# EAGLE board cos - POC (EAGLE 9.4.0)
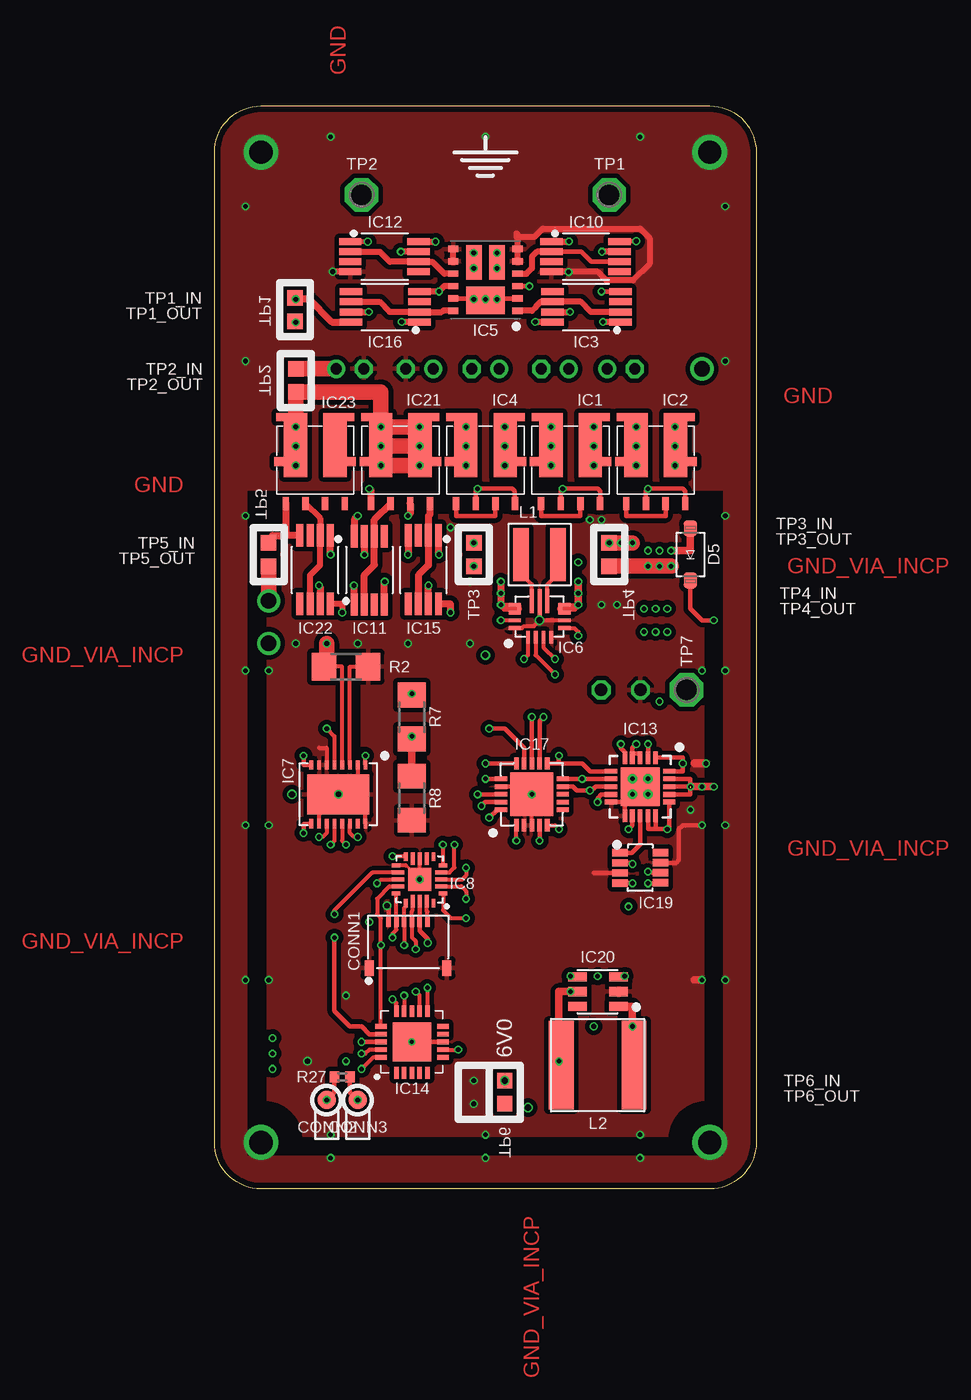
[diagram p0: board, top side]
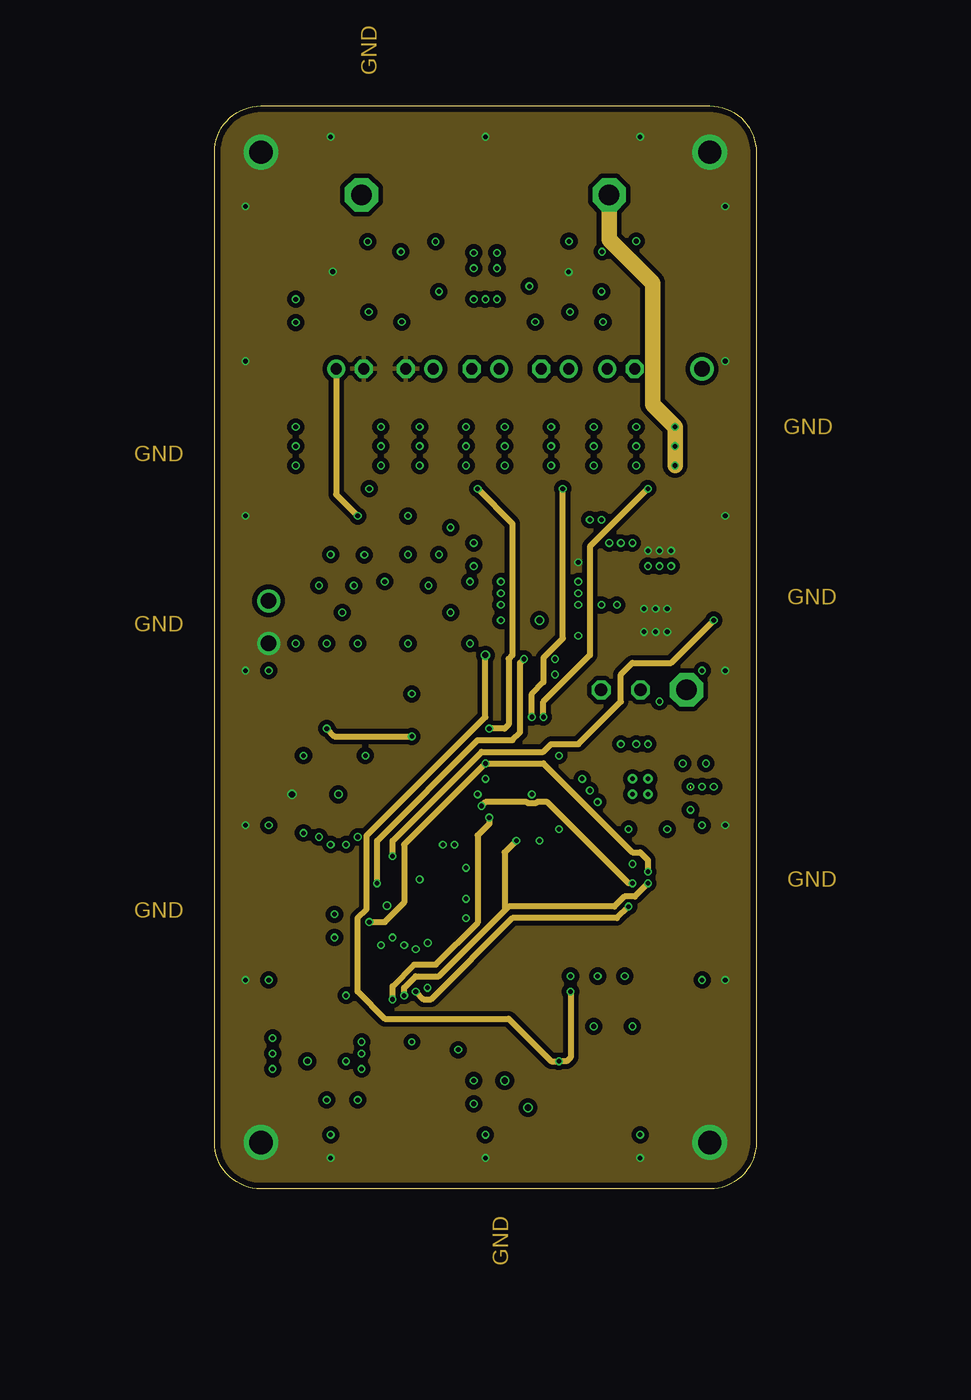
[diagram p1: board, inner layer Route2]
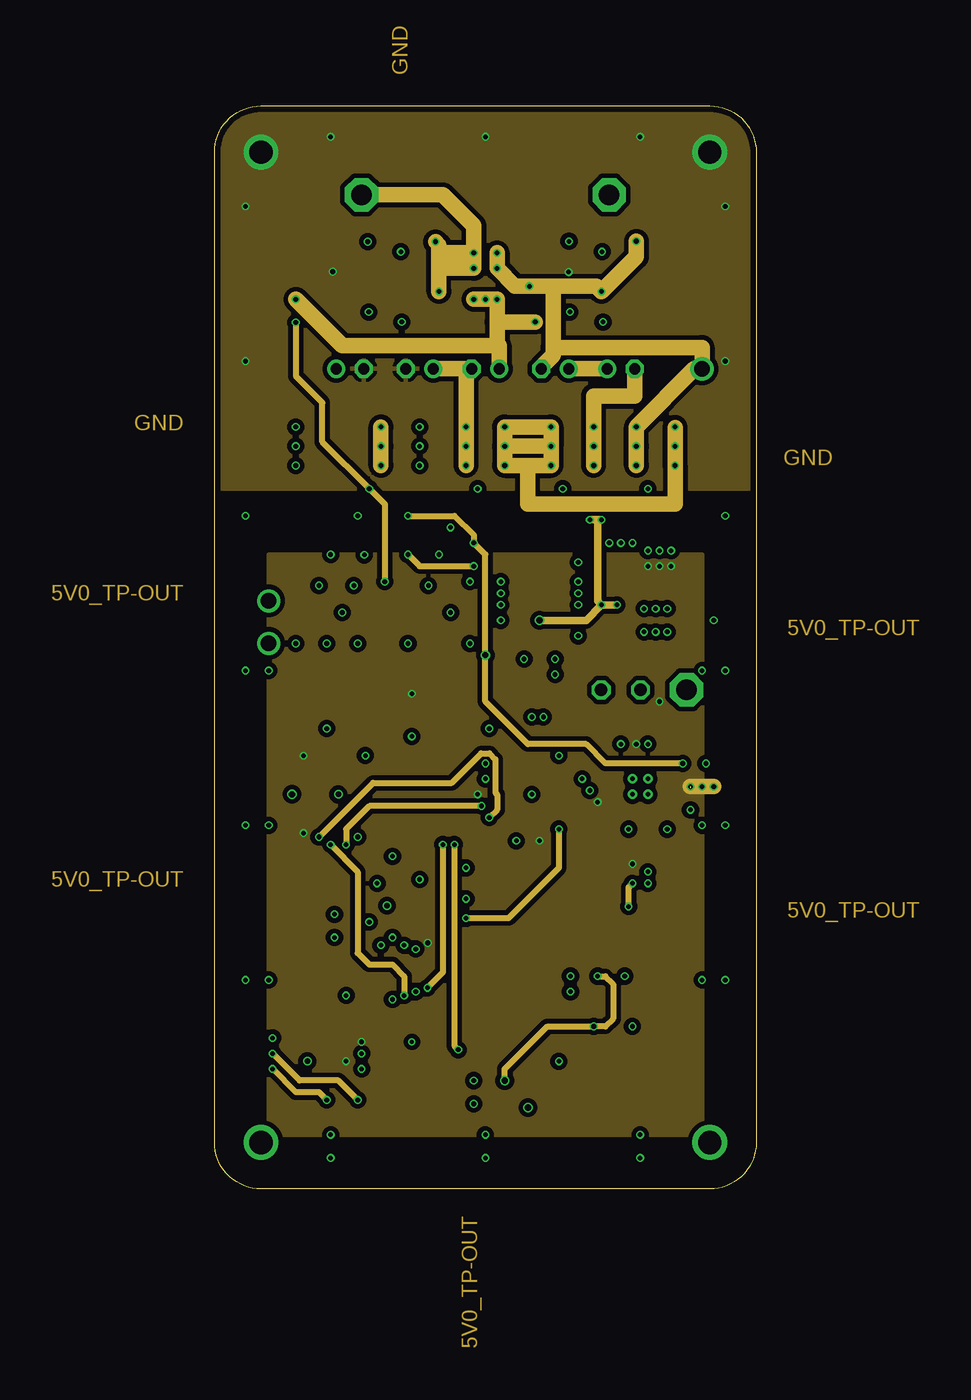
[diagram p2: board, inner layer Route15]
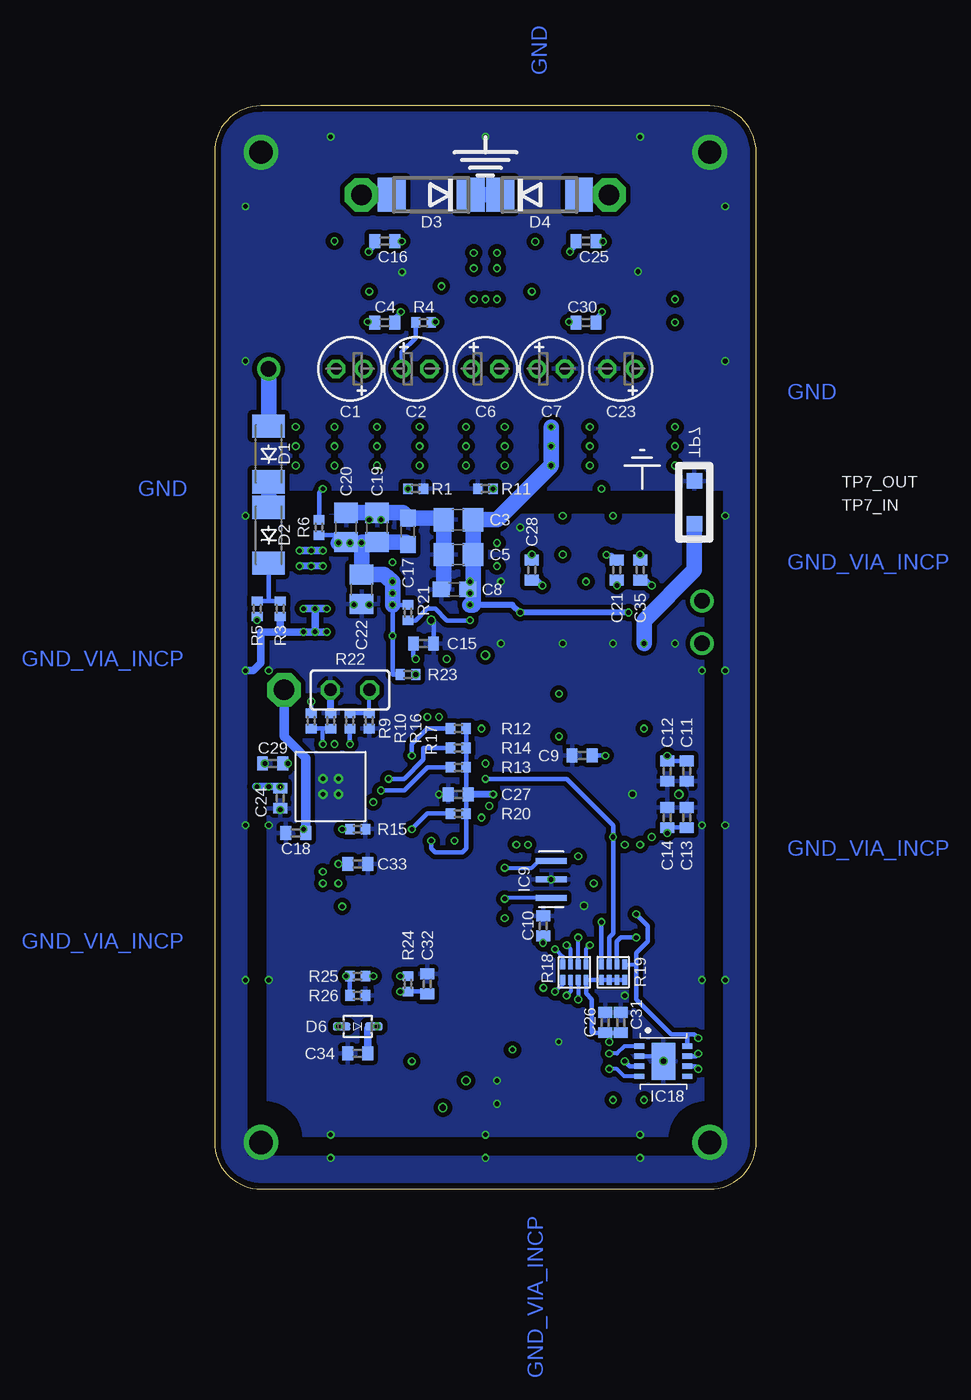
[diagram p3: board, bottom side, seen from below]

Size 35 x 70 mm. Coordinates in mm from the lower left corner, seen from the top.
Outline: 35,67 35,3 arc-90 32,0 3,0 arc-90 0,3 0,67 arc-90 3,70 32,70 arc-90 35,67
Copper layers (1*2*15*16): Top 0.035559375mm / dielectric 0.17018125mm / Route2 0.01778125mm / dielectric 47mil / Route15 0.01778125mm / dielectric 0.17018125mm / Bottom 0.035559375mm
Design rules "oshpark-4layer": minimum track width 5mil, minimum drill 10mil, track to track 5mil, track to pad 5mil, pad to pad 5mil, via to via 5mil, smd to smd 5mil, copper to edge 15mil, drill to drill 6mil, minimum pad ring 4mil, minimum via ring 4mil, stop-mask expansion 2.5mil, vias tented up to drill 0mil, thermal gap 10mil
Net classes: 0 GND: width 0.254 mm, drill 0.254 mm, clearance 0.127 mm; 1 Bat+: width 0.5 mm, drill 0.3 mm, clearance 0.2 mm; 2 5v0: width 0.3 mm, drill 0.3 mm, clearance 0.2 mm; 3 signal: width 0.25 mm, drill 0.3 mm, clearance 0.2 mm; 4 6V0: width 0.3 mm, drill 0.3 mm, clearance 0.2 mm; 5 dynamo_out: width 0.4 mm, drill 0.3 mm, clearance 0.2 mm
tRestrict: area 8.2,27.2 to 9,34.5; 7 lines
bRestrict: 2 lines

## Footprints (pad centres in the part's own frame; a part is rotated, then mirrored left to right if it is on the bottom)
E1,8-4 = drill 0.711 pad 1.168: + -0.889,0 | drill 0.711 pad 1.168 octagon: - 0.889,0
C0805 = smd 1.3 x 1.5: 1 -0.95,0; 2 0.95,0
C0402 = smd 0.7 x 0.9: 1 -0.65,0; 2 0.65,0
C0603 = smd 1.1 x 1: 1 -0.85,0; 2 0.85,0
SMT = smd 0.3 x 0.7: 1 -1.25,1.27; 2 -0.75,1.27; 3 -0.25,1.27; 4 0.25,1.27; 5 0.75,1.27; 6 1.25,1.27 | smd 0.6 x 1: GND1 -2.5,-1.73; GND2 2.5,-1.73
SMT-1.2MM = smd 1.2 x 1.2: P$1 0,0
SOD-123_MINI-SMA = smd 1.5 x 2.1: A 1.8,0; C -1.8,0
DO214AA = smd 1.8 x 2.2: A 2.55,0; C -2.55,0
SOD-123 = smd 1.02 x 0.86: A 1.68,0; C -1.68,0
SOD-323 = smd 1.14 x 0.52: A 1.04,0; C -1.04,0
SO-8L = smd 0.61 x 0.595: D1_1 -2.321,-0.734; D2_1 2.335,-0.734 | smd 1.5 x 3.63: D1_2 -1.263,0.072; D2_2 1.277,0.062 | smd 2 x 0.51: D1_3 -1.513,2.138; D2_3 1.527,2.134 | smd 0.41 x 0.82: G1 -0.628,-3.45; G2 1.912,-3.45; S1 -1.898,-3.45; S2 0.642,-3.45
VSSOP-8 = smd 0.45 x 1.45: ANODE 0.98,-2.23; CATHODE -0.97,2.17; GATE_DRIVE 0.33,2.17; GATE_PULLD -0.32,-2.23; NC1 0.33,-2.23; NC2 0.98,2.17; VCAPH -0.32,2.17; VCAPL -0.97,-2.23
MLP-12 = smd 0.4 x 0.65: 1_G1 -2,-2.075; 2_D1/D4 -1.2,-2.075; 3_S1/D2 -0.4,-2.075; 4_G2 0.4,-2.075; 5_S2 1.2,-2.075; 6_S2 2,-2.075; 7_S3 2,2.075; 8_S3 1.2,2.075; 9_G3 0.4,2.075; 10_D3/S4 -0.4,2.075; 11_D1/D4 -1.2,2.075; 12_G4 -2,2.075 | smd 1.78 x 2.5: D1/D4 -1.33,0 | smd 2.23 x 1: D3/S4 1.135,0.75; S1/D2 1.135,-0.75
VQFN = smd 0.8 x 0.25: 1-PS/S -1.35,0.75; 2-PG -1.35,0.25; 3-VAUX -1.35,-0.25; 4-GND -1.35,-0.75 | smd 0.25 x 0.8: 5-FB -0.75,-1.6; 6-FB2 -0.25,-1.6; 7-VOUT 0.25,-1.6; 8-VOUT 0.75,-1.6; 12-VIN 0.75,1.6; 13-VIN 0.25,1.6; 14-EN -0.25,1.6; 15-VSEL -0.75,1.6 | smd 1.55 x 0.25: 9-L2 0.99,-0.5; 11-L1 0.99,0.5 | smd 1.9 x 0.25: 10-PGND 0.815,0 | smd 0.6 x 0.25: VIN 0.5,1.325; VOUT 0.505,-1.325
WSON-16 = smd 0.25 x 0.6: 1_REFC -1.75,-1.9; 2_REFG -1.25,-1.9; 3_INCP -0.75,-1.9; 4_INCN -0.25,-1.9; 5_INVP 0.25,-1.9; 6_INVG 0.75,-1.9; 7_GND 1.25,-1.9; 8_VDD 1.75,-1.9; 9_VDIG 1.75,1.9; 10_DGND 1.25,1.9; 11_SDO 0.75,1.9; 12_SDI 0.25,1.9; 13_SCLK -0.25,1.9; 14_CSB -0.75,1.9; 15_RESERVED -1.25,1.9; 16_RESET -1.75,1.9 | smd 4 x 2.6: GND1 0,0
VQFN-20 = smd 0.55 x 0.25: 1 -1.52,0.9; 5 -1.52,-0.9; 11 1.52,-0.9; 15 1.52,0.9 | smd 0.8 x 0.25: 2 -1.4,0.45; 3 -1.4,0; 4 -1.4,-0.45; 12 1.4,-0.45; 13 1.4,0; 14 1.4,0.45 | smd 0.25 x 0.55: 6 -0.9,-1.48; 10 0.9,-1.48; 16 0.9,1.52; 20 -0.9,1.52 | smd 0.25 x 0.8: 7 -0.45,-1.35; 8 0,-1.35; 9 0.45,-1.35; 17 0.45,1.4; 18 0,1.4; 19 -0.45,1.4 | smd 1.5 x 1.5: GND 0,0
SMT' = smd 0.4 x 2: GND 0,0; XTAL1 -1.2,0; XTAL2 1.2,0
QFN50P400X400X100-21N = smd 0.8 x 0.3: 1_OUT1 -1.88,0.991; 2_VPCC -1.88,0.508; 3_SEL -1.88,0; 4_PROG2 -1.88,-0.508; 5_THERM -1.88,-0.991; 11_GND2 1.88,-0.991; 12_PROG3 1.88,-0.508; 13_PROG1 1.88,0; 14_VBAT1 1.88,0.508; 15_VBAT2 1.88,0.991 | smd 0.3 x 0.8: 7_STAT2 -0.508,-1.88; 8_STAT1/!LBO! 0,-1.88; 9_!TE! 0.508,-1.88; 10_GND1 0.991,-1.88; 16_BAT_SENSE 0.991,1.88; 17_CE 0.508,1.88; 18_IN1 0,1.88; 19_IN2 -0.508,1.88; 20_OUT2 -0.991,1.88; !6_PG! -0.991,-1.88 | smd 2.5 x 2.5: GND2 0,0 | drill 0.3 pad 0.61: GND3 -0.5,-0.5; GND4 0.5,-0.5; GND5 0.5,0.5; GND6 -0.5,0.5
QFN20 = smd 0.3 x 0.75: !CS! 1,2; !RESET! 0.5,2; !RX0BF! 1,-2; !RX1BF! 0.5,-2; GND6 0,-2; OSC1 -0.5,-2; OSC2 -1,-2; RXCAN -1,2; TXCAN -0.5,2; VDD 0,2 | smd 0.75 x 0.3: !INT! 2,-1; !TX0RTS! -2,0.5; !TX1RTS! -2,0; !TX2RTS! -2,-1; CLKOUT -2,1; NC1 -2,-0.5; NC2 2,0; SCK 2,-0.5; SI 2,0.5; SO 2,1 | smd 2.5 x 2.5: GND 0,0
QFN20' = smd 0.8 x 0.3: 1_MOSI -2,1; 2_A1 -2,0.5; 3_A0 -2,0; 4_!RESET! -2,-0.5; 5_!CS! -2,-1; 11_GP2 2,-1; 12_GP3 2,-0.5; 13_GP4 2,0; 14_GP5 2,0.5; 15_GP6 2,1 | smd 0.3 x 0.8: 6_NC -1,-2; 7_INT -0.5,-2; 8_NC 0,-2; 9_GP0 0.5,-2; 10_GP1 1,-2; 16_GP7 1,2; 17_GND 0.5,2; 18_VCC 0,2; 19_SCK -0.5,2; 20_MISO -1,2 | smd 2.8 x 2.8: GND 0,0
DFN10 = smd 0.35 x 0.65: CANH -0.325,1.55; CANL 0.325,1.55; RXD 0.975,-1.55; SPLIT 0.975,1.55; STBY -0.975,1.55; TXD -0.975,-1.55; VDD 0.325,-1.55; VSS -0.325,-1.55 | smd 2.4 x 1.5: GND 0,0
SOT-23-8 = smd 0.48 x 1: 1_W -0.97,-1.3; 2_VDD -0.32,-1.3; 3_GND 0.33,-1.3; 4_CLK 0.98,-1.3; 5_SDI 0.97,1.3; 6_!CS! 0.32,1.3; 7_B -0.33,1.3; 8_A -0.98,1.3
TSOT23-6 = smd 0.6 x 1.2: 1_SW -0.95,-1.35; 2_GND 0,-1.35; 3_FB 0.95,-1.35; 4_EN 0.95,1.3; 5_IN 0,1.3; 6_FAULT -0.95,1.3
SMD = smd 1 x 3.4: P$1 -1.185,0; P$2 1.185,0
DJNR6045-100-S = smd 1.6 x 5.7: 1 -2.35,0; 2 2.35,0
R0402 = smd 0.6 x 0.7: 1 -0.5,0; 2 0.5,0
R1206 = smd 1.6 x 1.803: 1 -1.422,0; 2 1.422,0
0402 = smd 0.65 x 0.3: 1 -0.5,-0.75; 2 0.5,-0.75; 3 -0.5,-0.25; 4 0.5,-0.25; 5 -0.5,0.25; 6 0.5,0.25; 7 -0.5,0.75; 8 0.5,0.75
V526-0 = drill 0.813 octagon: 1 -1.27,0; 2 1.27,0
P1-13 = drill 1.321 pad 2.159 octagon: TP 0,0
TP10SQ = smd 1 x 1: TP 0,0

## Placement (x,y rotation side)
C1  3300μF / 35V / ultralow ESR  [E1,8-4]  26.25,53 180 bottom
C2  3300μF / 35V / ultralow ESR  [E1,8-4]  22,53 0 bottom
C3  10μF  [C0805]  19.25,43.25 180 bottom
C4  0.1μF  [C0402]  24,56 0 bottom
C5  10μF  [C0805]  19.25,41 180 bottom
C6  330μF  [E1,8-4]  17.5,53 0 bottom
C7  220μF  [E1,8-4]  13.25,53 0 bottom
C8  10μF  [C0603]  19.5,38.75 180 bottom
C9  1μF  [C0402]  11.25,28 180 bottom
C10  0.1μF  [C0402]  13.75,17 90 bottom
C11  10pF  [C0402]  4.5,27 270 bottom
C12  0.1μF  [C0402]  5.75,27 270 bottom
C13  10pF  [C0402]  4.5,24 90 bottom
C14  0.1μF  [C0402]  5.75,24 90 bottom
C15  100nF  [C0402]  21.5,35.25 0 bottom
C16  0.1μF  [C0402]  24,61.25 180 bottom
C17  10μF  [C0603]  22.5,42.5 90 bottom
C18  4.7μF  [C0402]  29.75,23 180 bottom
C19  10μF  [C0805]  24.5,42.75 90 bottom
C20  10μF  [C0805]  26.5,42.75 90 bottom
C21  0.1μF  [C0402]  9,40 90 bottom
C22  10μF  [C0805]  25.5,38.75 270 bottom
C23  5600μF  [E1,8-4]  8.75,53 180 bottom
C24  10μF  [C0402]  30.75,25.25 270 bottom
C25  0.1μF  [C0402]  11,61.25 180 bottom
C26  0.1μF  [C0402]  9.75,10.75 90 bottom
C27  0.1μF  [C0402]  19.25,25.5 180 bottom
C28  0.1μF  [C0402]  14.5,40 270 bottom
C29  4.7μF  [C0402]  31.25,27.5 0 bottom
C30  0.1μF  [C0402]  11,56 0 bottom
C31  0.1μF  [C0402]  8.75,10.75 90 bottom
C32  10μF  [C0402]  21.25,13.25 90 bottom
C33  0.1μF  [C0402]  25.75,21 0 bottom
C34  22μF  [C0402]  25.75,8.75 180 bottom
C35  0.1μF  [C0402]  7.5,40 270 bottom
CONN1  5034800600  [SMT]  12.5,16 0 top
CONN2  CAN Low  [SMT-1.2MM]  7.25,5.75 180 top
CONN3  CAN High  [SMT-1.2MM]  9.25,5.75 180 top
D1  1N4148W-7-F  [SOD-123_MINI-SMA]  31.5,47.5 90 bottom
D2  1N4148W-7-F  [SOD-123_MINI-SMA]  31.5,42.25 90 bottom
D3  CZRB5353B-HF  [DO214AA]  21,64.25 180 bottom
D4  CZRB5353B-HF  [DO214AA]  14,64.25 0 bottom
D5  BZT52-C4V7X  [SOD-123]  30.75,41 90 top
D6  1N4148WS  [SOD-323]  25.75,10.5 180 bottom
IC1  SQJ952EP-T1_GE3  [SO-8L]  23,47.75 0 top
IC2  SQJ952EP-T1_GE3  [SO-8L]  28.5,47.75 0 top
IC3  LM74670QDGKRQ1  [VSSOP-8]  24,57 90 top
IC4  SQJ952EP-T1_GE3  [SO-8L]  17.5,47.75 0 top
IC5  FDMQ8403  [MLP-12]  17.5,58.75 90 top
IC6  TPS630702RNMT  [VQFN]  21,37 90 top
IC7  LMP92064SD/NOPB  [WSON-16]  8,25.5 180 top
IC8  ATTINY4313-MMH  [VQFN-20]  13.25,20 180 top
IC9  PBRC8.00GR50X000  [SMT']  13.25,20 270 bottom
IC10  LM74670QDGKRQ1  [VSSOP-8]  24,60.25 270 top
IC11  LM74670QDGKRQ1  [VSSOP-8]  10,40 0 top
IC12  LM74670QDGKRQ1  [VSSOP-8]  11,60.25 270 top
IC13  MCP73871-2CCI/ML  [QFN50P400X400X100-21N]  27.5,26 270 top
IC14  MCP2515  [QFN20]  12.75,9.5 90 top
IC15  LM74670QDGKRQ1  [VSSOP-8]  13.5,40 180 top
IC16  LM74670QDGKRQ1  [VSSOP-8]  11,57 90 top
IC17  MCP23S08-E/ML  [QFN20']  20.5,25.5 90 top
IC18  MCP2561-2  [DFN10]  6,8.25 270 bottom
IC19  AD5160BRJZ5-R2  [SOT-23-8]  27.5,20.75 270 top
IC20  MP3221GJ-P  [TSOT23-6]  24.75,12.75 90 top
IC21  SQJ952EP-T1_GE3  [SO-8L]  12,47.75 0 top
IC22  LM74670QDGKRQ1  [VSSOP-8]  6.5,40 180 top
IC23  SQJ952EP-T1_GE3  [SO-8L]  6.5,47.75 0 top
L1  XFL4020-152MEC  [SMD]  21,41 0 top
L2  DJNR6045-100-S  [DJNR6045-100-S]  24.75,8 0 top
R1  10k  [R0402]  22,45.25 180 bottom
R2  100k  [R1206]  8.5,33.75 0 top
R3  22k  [R0402]  30.75,37.5 90 bottom
R4  47k  [R0402]  21.5,56 0 bottom
R5  100k  [R0402]  32.25,37.5 270 bottom
R6  10k  [R0402]  28.25,42.75 270 bottom
R7  100k  [R1206]  12.75,30.5 90 top
R8  100k  [R1206]  12.75,25.25 90 top
R9  337k  [R0402]  28.75,30.25 90 bottom
R10  110k  [R0402]  27.5,30.25 270 bottom
R11  10k  [R0402]  17.5,45.25 0 bottom
R12  47k  [R0402]  19.25,29.75 0 bottom
R13  47k  [R0402]  19.25,27.25 0 bottom
R14  47k  [R0402]  19.25,28.5 0 bottom
R15  100k  [R0402]  25.75,23.25 180 bottom
R16  1k  [R0402]  26.25,30.25 90 bottom
R17  270k  [R0402]  25,30.25 90 bottom
R18  741X083331JP / 330Ω  [0402]  11.75,14 270 bottom
R19  741X083103JP / 10kΩ  [0402]  9.25,14 90 bottom
R20  10k  [R0402]  19.25,24.25 0 bottom
R21  10k  [R0402]  22.5,37.25 90 bottom
R22  thermistor NTC 10k  [V526-0]  26.25,32.25 0 bottom
R23  100k  [R0402]  22.5,33.25 180 bottom
R24  100k  [R0402]  22.5,13.25 270 bottom
R25  653k  [R0402]  25.75,13.75 0 bottom
R26  100k  [R0402]  25.75,12.5 180 bottom
R27  120  [R0402]  8.25,7.25 0 top
TP1  Li-Ion Cell +  [P1-13]  25.5,64.25 0 top
TP1_IN  PTR1TP10SQ  [TP10SQ]  5.2,57.58 270 top
TP1_OUT  PTR1TP10SQ  [TP10SQ]  5.2,56.08 270 top
TP2  Li-Ion Cell +  [P1-13]  9.5,64.25 0 top
TP2_IN  PTR1TP10SQ  [TP10SQ]  5.25,53 270 top
TP2_OUT  PTR1TP10SQ  [TP10SQ]  5.25,51.5 270 top
TP3_IN  PTR1TP10SQ  [TP10SQ]  16.75,41.75 0 top
TP3_OUT  PTR1TP10SQ  [TP10SQ]  16.75,40.25 0 top
TP4_IN  PTR1TP10SQ  [TP10SQ]  25.5,41.75 270 top
TP4_OUT  PTR1TP10SQ  [TP10SQ]  25.5,40.25 270 top
TP5_IN  PTR1TP10SQ  [TP10SQ]  3.5,41.75 0 top
TP5_OUT  PTR1TP10SQ  [TP10SQ]  3.5,40.25 0 top
TP6_IN  PTR1TP10SQ  [TP10SQ]  18.75,7 0 top
TP6_OUT  PTR1TP10SQ  [TP10SQ]  18.75,5.5 0 top
TP7  Li-Ion Cell +  [P1-13]  30.5,32.25 0 top
TP7_IN  PTR1TP10SQ  [TP10SQ]  4,43 0 bottom
TP7_OUT  PTR1TP10SQ  [TP10SQ]  4,45.75 0 bottom

## Library data of the parts
C1-C35 = rcl; SPICEPREFIX: C
CONN1 = 5034800600 FPC Connector
CONN2 CONN3 = signal testpoint
D1-D4 = diode
D5 = Diodes; CREATED_BY: PCBLayout.com; MANUFACTURER: JCET; MPN: CESD5V0D1; PACKAGE: SOD-123
D6 = Diodes; CREATED_BY: PCBLayout.com; DIGIKEY_PART_NUMBER: 1N4148WSFSTR-ND; MANUFACTURER: Diodes Incorporated; MPN: 1N4148WS; PACKAGE: SOD-323
IC1 IC2 IC4 IC21 IC23 = SQJ952EP-T1_GE3 - Dual N-Fet
IC3 IC10-IC12 IC15 IC16 IC22 = LM74670 - Smart Diode Rectifier Controller
IC5 = FDMQ8403 4x N-Channel Fet
IC6 = TPS630701 - Buck Boost 5V regulator
IC7 = LMP92064SD - LMP92064 Precision Low-Side, 125-kSps Simultaneous Sampling Current Sensor and Voltage Monitor With SPI
IC8 = ATtiny4313 microcontroller; SPICEPREFIX: X
IC9 = PRQV8.00CR1510Y00L - 8MHz resonator
IC13 = MCP73871 - Powerpath and Charge Controller; MPN: MCP73871-2AAI/ML; OC_FARNELL: 1642487; OC_NEWARK: 54M4955; PACKAGE: QFN-20; SUPPLIER: Microchip
IC14 = MCP2515-I-ML - Standalonce CAN Controller with SPI Interface
IC17 = MCP23S08 - 8-Bit IO Expander with Serial Interface
IC18 = MCP2561-2 - High-Speed CAN Transceiver
IC19 = ad5160 - 256-Position SPI-Compatible Digital Potentiometer
IC20 = MP3221–2.7A, 1.2MHZ, HIGH-EFFICIENCY STEP UP CONVERTER WITH INPUT DISCONNECT
L1 = XFL4020-152MEC Inductor 1.5uH
L2 = DJNR6045-100S Power Inductor
R1-R17 R20-R27 = rcl; SPICEPREFIX: R
R18 R19 = 741X083331JP Resistor Array
TP1 TP1_IN TP1_OUT TP2 TP2_IN TP2_OUT TP3_IN TP3_OUT TP4_IN TP4_OUT TP5_IN TP5_OUT TP6_IN TP6_OUT TP7 TP7_IN TP7_OUT = testpad

## Nets
5V0_TP-IN [5v0]: C17.1 C19.1 C20.1 C22.1 IC6.5-FB IC6.7-VOUT IC6.8-VOUT IC6.VOUT R6.2 R21.2 R23.2 TP4_IN.TP
5V0_TP-OUT [5v0]: C10.1 C11.1 C12.1 C13.1 C14.1 C24.1 C26.1 C27.1 C31.1 C33.1 CONN1.5 IC7.8_VDD IC7.9_VDIG IC8.18 IC13.3_SEL IC13.4_PROG2 IC13.9_!TE! IC13.17_CE IC13.18_IN1 IC13.19_IN2 IC14.VDD IC17.4_!RESET! IC17.18_VCC IC18.VDD IC19.2_VDD R7.2 R9.2 R12.2 R13.2 R14.2 R18.8 R19.1 R19.3 R19.5 R19.7 R20.2 TP4_OUT.TP
6V0_TP-IN: C34.1 D6.C R25.2 TP6_IN.TP
6V0_TP-OUT: TP6_OUT.TP
AD5160_CS: IC17.15_GP6 IC19.6_!CS! R19.8
AFTER_SW_BEFORE_TUNING_CAP: C1.- IC1.D2_1 IC1.D2_2 IC1.D2_3
CANH [5v0]: CONN3.P$1 IC18.CANH R27.2
CANL [5v0]: CONN2.P$1 IC18.CANL R27.1
CLOCKOUT [signal]: IC8.4 IC14.OSC1
COMP_IN: D5.C IC8.10 R5.2
D1_VCAPH: C4.2 IC3.VCAPH
D1_VCAPL: C4.1 IC3.VCAPL
D2_VCAPH: C16.2 IC10.VCAPH
D2_VCAPL: C16.1 IC10.VCAPL
D3_VCAPH: C25.2 IC12.VCAPH
D3_VCAPL: C25.1 IC12.VCAPL
D4_VCAPH: C30.2 IC16.VCAPH
D4_VCAPL: C30.1 IC16.VCAPL
D_SMOOTH_VCAP: C21.1 IC11.VCAPL
D_SMOOTH_VCAPH: C21.2 IC11.VCAPH
D_VLIION_VCAPH: C28.2 IC15.VCAPH
D_VLIION_VCAPH1: C35.2 IC22.VCAPH
D_VLIION_VCAPL: C28.1 IC15.VCAPL
D_VLIION_VCAPL1: C35.1 IC22.VCAPL
DEBUGWIRE/RESET [signal]: CONN1.6 IC8.19
DELON_1: C6.- C7.+ IC4.D1_1 IC4.D1_2 IC4.D1_3
DYNAMO_1 [dynamo_out]: D4.A IC5.10_D3/S4 IC5.D3/S4 IC12.CATHODE IC16.ANODE TP2.TP
DYNAMO_2_AFTER_SW: C2.- D1.A IC2.D1_1 IC2.D1_2 IC2.D1_3 IC3.ANODE IC5.3_S1/D2 IC5.S1/D2 IC10.CATHODE
DYNAMO_2_BEFORE_SW: D3.A IC1.D1_1 IC1.D1_2 IC1.D1_3 IC2.D2_1 IC2.D2_2 IC2.D2_3 IC4.D2_1 IC4.D2_2 IC4.D2_3 TP1.TP
EN: IC6.14-EN R21.1
EN2: IC20.4_EN R24.1
FB: IC20.3_FB R25.1 R26.2
GATE_D1: IC3.GATE_DRIVE IC3.GATE_PULLD IC5.1_G1
GATE_D2: IC5.4_G2 IC10.GATE_DRIVE IC10.GATE_PULLD
GATE_D3: IC5.9_G3 IC12.GATE_DRIVE IC12.GATE_PULLD
GATE_D4: IC5.12_G4 IC16.GATE_DRIVE IC16.GATE_PULLD
GATE_DELON: IC4.G1 IC4.G2 IC17.14_GP5 R11.2
GATE_DIODE_SMOOTH: IC11.GATE_DRIVE IC11.GATE_PULLD IC21.G1
GATE_DIODE_V_LIION: IC15.GATE_DRIVE IC15.GATE_PULLD IC21.G2
GATE_GRAETZ: IC2.G1 IC2.G2 IC17.12_GP3 R6.1
GATE_SOLAR-CELL: IC22.GATE_DRIVE IC22.GATE_PULLD IC23.G1
GATE_TUNING-CAP: IC1.G1 IC1.G2 IC17.13_GP4 R1.2
GND: C7.- C23.- D5.A IC5.5_S2 IC5.6_S2 IC5.7_S3 IC5.8_S3 IC10.ANODE IC12.ANODE R1.1 R3.1 R11.1 TP7_OUT.TP
GND_VIA_INCP: C3.2 C5.2 C8.2 C9.2 C10.2 C11.2 C12.2 C13.2 C14.2 C15.2 C17.2 C18.2 C19.2 C20.2 C22.2 C24.2 C26.2 C27.2 C29.1 C31.2 C32.2 C33.2 C34.2 CONN1.1 CONN1.GND1 CONN1.GND2 IC6.4-GND IC6.6-FB2 IC6.10-PGND IC6.15-VSEL IC7.2_REFG IC7.3_INCP IC7.6_INVG IC7.7_GND IC7.10_DGND IC7.16_RESET IC7.GND1 IC8.8 IC8.11 IC8.GND IC9.GND IC13.10_GND1 IC13.11_GND2 IC13.GND2 IC13.GND3 IC13.GND4 IC13.GND5 IC13.GND6 IC14.GND IC14.GND6 IC17.2_A1 IC17.3_A0 IC17.17_GND IC17.GND IC18.GND IC18.VSS IC19.3_GND IC19.7_B IC20.2_GND R2.2 R8.1 R10.1 R15.1 R17.1 R22.1 R26.1
ICSP_DI/MISO [signal]: CONN1.2 IC8.15 R18.5
ICSP_DO/MOSI [signal]: CONN1.3 IC8.16 R18.3
ICSP_SCK [signal]: CONN1.4 IC8.17 R18.1
INCN: IC7.4_INCN R2.1 TP7_IN.TP
INT_MCP23S08: IC17.7_INT
INT_MCP2515 [signal]: IC8.5 IC14.!INT!
INVP: IC7.5_INVP R7.1 R8.2
LMP92064SD_CS: IC7.14_CSB IC17.16_GP7 R19.6
MCP73871_PG_PIN [signal]: IC13.!6_PG! IC17.11_GP2 R12.1
MCP73871_STAT1/!LBO!_PIN [signal]: IC13.8_STAT1/!LBO! IC17.9_GP0 R13.1
MCP73871_STAT2_PIN [signal]: IC13.7_STAT2 IC17.10_GP1 R14.1
N$1: IC6.11-L1 L1.P$1
N$2: IC8.6
N$3: D1.C D2.A
N$4: D2.C R3.2 R5.1
N$5: IC6.9-L2 L1.P$2
N$6: IC8.7
N$7: IC8.9
N$8: R16.2 R17.2 R22.2
N$9: IC8.20
N$13: IC1.S1 IC1.S2
N$16: IC2.S1 IC2.S2
N$17: C9.1 IC7.1_REFC
N$20: IC4.S1 IC4.S2
PG [signal]: IC6.2-PG R23.1
PROG1 [signal]: IC13.13_PROG1 IC19.1_W
PROG3 [signal]: IC13.12_PROG3 R15.2
PS/SYNC [signal]: IC6.1-PS/S IC8.13
RESET [signal]: IC14.!RESET! R19.4
RXCAN [signal]: IC14.RXCAN IC18.RXD
SOLAR-CELL_TP-IN: TP5_OUT.TP
SOLAR-CELL_TP-OUT: IC22.ANODE IC23.S1 TP5_IN.TP
SPI_MISO [signal]: IC7.11_SDO IC14.SO IC17.20_MISO R18.6
SPI_MOSI [signal]: IC7.12_SDI IC14.SI IC17.1_MOSI IC19.5_SDI R18.4
SPI_SCK: IC7.13_SCLK IC14.SCK IC17.19_SCK IC19.4_CLK R18.2
SPI_SS_MCP23S08: IC8.1 IC17.5_!CS! R20.1
SPI_SS_MCP2515 [signal]: IC8.14 IC14.!CS! R18.7
STBY [signal]: IC8.12 IC18.STBY R19.2
SW: D6.A IC20.1_SW L2.2
THERM: IC13.5_THERM R16.1
TUNIN_CAP2_BIAS: C1.+ C2.+ R4.1
TXCAN [signal]: IC14.TXCAN IC18.TXD
V_DC_TP-IN: C6.+ IC3.CATHODE IC5.2_D1/D4 IC5.11_D1/D4 IC5.D1/D4 IC16.CATHODE R4.2 TP1_IN.TP
V_DC_TP-OUT: IC11.ANODE IC21.S1 TP1_OUT.TP
V_LI-ION_BATTERY-CELL: C18.1 IC13.14_VBAT1 IC13.15_VBAT2 IC13.16_BAT_SENSE TP7.TP
V_LI-ION_OUT: C29.2 C32.1 IC13.1_OUT1 IC13.20_OUT2 IC20.5_IN IC21.S2 L2.1 R24.2 TP3_IN.TP
V_LI-ION_TP-OUT: IC15.ANODE TP3_OUT.TP
V_REGULATED_TP-IN [5v0]: C23.+ IC11.CATHODE TP2_IN.TP
V_REGULATED_TP-OUT [5v0]: C3.1 C5.1 C8.1 IC6.12-VIN IC6.13-VIN IC6.VIN IC15.CATHODE IC21.D1_1 IC21.D1_2 IC21.D1_3 IC21.D2_1 IC21.D2_2 IC21.D2_3 IC22.CATHODE IC23.D1_1 IC23.D1_2 IC23.D1_3 TP2_OUT.TP
VAUX: C15.1 IC6.3-VAUX
VPCC: IC13.2_VPCC R9.1 R10.2
XTAL1 [signal]: IC8.3 IC9.XTAL1
XTAL2 [signal]: IC8.2 IC9.XTAL2
ZENER_COMMON: D3.C D4.C

## Tracks (layer width: path | path; a pad name or v marks a point on that pad's centre or on a via)
5V0_TP-IN  (via drill 0.3)
  Top 0.25: v23.5,37.75 IC6.8-VOUT 22.32,37.75 IC6.VOUT 22.32,37.25 IC6.7-VOUT | v23.5,35.75 23.5,36 23.25,36.25 IC6.5-FB
  Top 0.4: IC6.VOUT 23.25,37.51 v23.5,37.75
  Top 0.5: v23.5,37.75 v23.5,39.26
  Top 1: v27,41.75 v26.25,41.75 TP4_IN.TP
  Bottom 0.3: R23.2 23.5,33.25 v23.5,35.75 v23.5,37.75 R21.2 | C20.1 26.55,41.8 27,42.25 R6.2
  Bottom 0.45: TP4_IN.TP 25.55,41.8 C20.1
  Bottom 1: TP4_IN.TP v26.25,41.75 | C20.1 26.95,41.8 v27,41.75 | C17.1 22.65,41.8 C19.1 25.45,41.8 TP4_IN.TP | TP4_IN.TP C22.1 24.05,39.7 23.89,39.55 | v23.5,39.25 23.8,39.55 23.89,39.55 | v23.5,37.75 v23.5,38.5 23.5,39.15 23.89,39.55
  other vias: 25.5,41.75
5V0_TP-OUT  (via drill 0.3)  (1 unrouted)
  Top 0.3: IC19.2_VDD 26.93,21.07 v27,21 | IC7.9_VDIG 5.75,23.6 v5.75,23 | IC7.8_VDD 5.75,27.4 v5.75,28 | IC13.19_IN2 30.75,26.51 v30.75,26 | v30.75,26 IC13.18_IN1 | IC13.17_CE 30.75,25.49 v30.75,26 | IC13.4_PROG2 26.99,28.16 | 26.99,28.16 26.99,28.49 v27.25,28.75 | IC13.9_!TE! 24.99,25.49 24.75,25.25 v24.75,25 | IC13.3_SEL 27.5,28.16 26.99,28.16 | v13.77,15.89 13.77,16.14 13.25,16.67 CONN1.5 IC8.18 | IC17.4_!RESET! v21,22.5 | IC17.18_VCC v17,25.5 | IC14.VDD v9.5,9.5 | R7.2 v12.75,32
  Top 0.5: v32.25,26 v30.75,26
  Top 1: TP4_OUT.TP v29.5,40.25
  Route15 1: v30.75,26 v31.5,26 v32.25,26
  Bottom 0.3: C11.1 C12.1 v5.75,28 | C13.1 C14.1 v5.75,23 | v27,21 C33.1 | R12.2 R14.2 R13.2 18.75,25.65 C27.1 18.75,25.35 R20.2 18.75,22 19,21.75 20.75,21.75 21,22 v21,22.5 | R19.1 R19.3 R19.5 R19.7 R18.8 11,12.64 10.62,12.26 10.62,10.12 10.6,10.1 C26.1 9.5,10.1 | IC18.VDD 8.18,7.92 v8.5,8.25 | 8.75,10 C31.1 9.5,10.1 | 9.5,9.6 v9.5,9.5 9.5,10.1 | R9.2 v28.75,31.5 | v13.77,15.89 13.75,15.92 C10.1
  Bottom 0.45: v28,40.25 v28.75,40.25 v29.5,40.25 | v17,25.5 C27.1
  Bottom 0.5: C24.1 30.85,26 32.35,26
  pour Route15 (isolate 0.3): 3.5,41 31.5,41 31.5,3.5 3.5,3.5
6V0_TP-IN  (via drill 0.3, 0.4)
  Route15 0.4: TP6_IN.TP 18.75,7.75 21.5,10.5 v24.5,10.5 25.25,10.5 25.75,11 25.75,13.25 R25.2 v24.75,13.75
  Bottom 0.3: D6.C v24.5,10.5 | R25.2 v24.75,13.75
  Bottom 0.5: D6.C 24.96,10.5 25.1,10.36 C34.1
  other vias: 18.75,7
AD5160_CS  (via drill 0.3)
  Top 0.254: IC19.6_!CS! 28.07,20.43 v28,20.5
  Top 0.3: v17.5,27.5 IC17.15_GP6
  Route2 0.4: v28,20.5 28,21.25 27.5,21.75 27,21.75 21.25,27.5 v17.5,27.5 12.25,22.25 12.25,18.5 11,17.25 v10,17.25
  Bottom 0.3: R19.8 v10,17.25
AFTER_SW_BEFORE_TUNING_CAP  (via drill 0.3)
  Top 0.4: IC1.D2_2 25.07,47.02 IC1.D2_1 24.77,47.02 v24.5,46.75 | IC1.D2_2 24.31,47.81 v24.5,48 | IC1.D2_2 24.28,49.03 v24.5,49.25 | IC1.D2_2 24.28,49.63 IC1.D2_3
  Route15 1: v24.5,46.75 v24.5,48 v24.5,49.25 24.5,51.25 27.14,51.25 C1.-
CANH  (via drill 0.3)
  Top 0.3: CONN3.P$1 8.75,6.25 R27.2
  Route15 0.4: v3.75,8.75 5.5,7 8,7 CONN3.P$1
  Bottom 0.3: v3.75,8.75 3.92,8.57 IC18.CANH
  other vias: 9.25,5.75
CANL  (via drill 0.3)
  Top 0.3: CONN2.P$1 7.75,6.25 R27.1
  Route15 0.4: v3.75,7.75 5.25,6.25 6.75,6.25 CONN2.P$1
  Bottom 0.3: v3.75,7.75 3.92,7.92 IC18.CANL
  other vias: 7.25,5.75
CLOCKOUT  (via drill 0.3)
  Top 0.25: IC8.4 15.18,20.45 15.5,20.77 v15.5,22.25 | IC14.OSC1 v15.75,9
  Route15 0.4: v15.5,22.25 15.5,9.25 v15.75,9
COMP_IN  (via drill 0.3)
  Top 0.254: IC8.10 11.52,21.48 v11.5,21.5
  Top 0.3: v32.25,36.75 31.5,36.75 30.75,37.5 D5.C
  Route2 0.4: v11.5,21.5 11.5,22.5 17.25,28.25 21.25,28.25 21.75,28.75 23.5,28.75 26.25,31.5 26.25,33.25 27,34 29.5,34 v32.25,36.75
  Bottom 0.3: R5.2 v32.25,36.75
D1_VCAPH  (via drill 0.3)
  Top 0.4: IC3.VCAPH v22.96,56.68
  Bottom 0.3: C4.2 23.35,56.29 v22.96,56.68
D1_VCAPL  (via drill 0.3)
  Top 0.4: IC3.VCAPL v25.1,56.03
  Bottom 0.3: v25.1,56.03 24.68,56.03 C4.1
D2_VCAPH  (via drill 0.3)
  Top 0.4: IC10.VCAPH v25.04,60.57
  Bottom 0.3: v25.04,60.57 24.65,60.96 C16.2
D2_VCAPL  (via drill 0.3)
  Top 0.4: IC10.VCAPL 22.88,61.22 v22.9,61.24
  Bottom 0.3: C16.1 v22.9,61.24
D3_VCAPH  (via drill 0.3)
  Top 0.4: IC12.VCAPH v12.04,60.57
  Bottom 0.3: C25.2 11.65,60.96 v12.04,60.57
D3_VCAPL  (via drill 0.3)
  Top 0.3: IC12.VCAPL v9.9,61.22
  Bottom 0.3: C25.1 10.32,61.22 v9.9,61.22
D4_VCAPH  (via drill 0.3)
  Top 0.4: IC16.VCAPH v9.96,56.68
  Bottom 0.3: C30.2 10.35,56.29 v9.96,56.68
D4_VCAPL  (via drill 0.3)
  Top 0.4: IC16.VCAPL v12.1,56.03
  Bottom 0.3: v12.1,56.03 11.68,56.03 C30.1
D_SMOOTH_VCAP  (via drill 0.3)
  Top 0.45: v9,39 9,37.8 IC11.VCAPL
  Bottom 0.3: C21.1 v9,39
D_SMOOTH_VCAPH  (via drill 0.3)
  Top 0.45: IC11.VCAPH v9.68,40.98
  Bottom 0.3: C21.2 9.33,40.98 v9.68,40.98
D_VLIION_VCAPH  (via drill 0.3)
  Top 0.45: IC15.VCAPH v13.82,39
  Bottom 0.4: v13.82,39 14.17,39.35 C28.2
D_VLIION_VCAPH1  (via drill 0.3)
  Top 0.45: v6.75,39 6.82,38.93 IC22.VCAPH
  Bottom 0.3: v6.75,39 7.1,39.35 C35.2
D_VLIION_VCAPL  (via drill 0.3)
  Top 0.45: IC15.VCAPL 14.47,41.03 v14.5,41
  Bottom 0.4: v14.5,41 C28.1
D_VLIION_VCAPL1  (via drill 0.3)
  Top 0.45: v7.5,41 7.47,41.03 IC22.VCAPL
  Bottom 0.3: C35.1 v7.5,41
DEBUGWIRE/RESET
  Top 0.25: CONN1.6 13.75,17.93 13.7,17.98 IC8.19
DELON_1  (via drill 0.3)
  Top 0.3: 16.24,48 16.24,49.25 16.24,49.89 IC4.D1_3 | IC4.D1_1 16.25,47.02 v16.25,46.75
  Top 0.5: 16.24,48 v16.25,48
  Top 1: IC4.D1_2 16.24,48 | IC4.D1_2 16.24,49.25 | IC4.D1_2 v16.25,46.75
  Route15 1: C7.+ C6.- 16.25,53 v16.25,49.25 v16.25,48 v16.25,46.75
DYNAMO_1  (via drill 0.3)
  Top 0.4: IC12.CATHODE v14.28,61.22 | IC16.ANODE 14.48,57.98 v14.5,58 14.85,58.35 IC5.10_D3/S4
  Top 1: IC5.D3/S4 v16.75,60.5
  Route15 1: TP2.TP 14.75,64.25 16.75,62.25 v16.75,60.5 | v16.75,60.5 v16.75,59.5 14.5,59.5 | v14.5,58 14.5,59.5 | 14.5,59.5 14.5,60.5 | 14.5,60.5 14.5,61 v14.28,61.22 | v16.75,60.5 14.5,60.5
  Bottom 1: TP2.TP D4.A
DYNAMO_2_AFTER_SW  (via drill 0.3, 1)
  Top 0.3: 27.24,48 27.24,49.25 | IC5.3_S1/D2 v20.33,58.35 v20.34,58.34 | IC3.ANODE 25,57.98 v25,58 | IC10.CATHODE 26.17,61.25 v27.25,61.25 | IC5.S1/D2 v18.25,59.5
  Top 0.4: IC2.D1_1 27.25,47.02 | IC2.D1_3 27.24,49.64 27.24,49.25
  Top 0.5: 27.25,47.02 v27.25,46.75 | IC2.D1_2 27.24,48 v27.25,48
  Route15 1: v18.25,60.5 v18.25,59.5 19.41,58.34 v20.34,58.34 21.75,58.34 | 21.75,58.34 24.66,58.34 v25,58 27.25,60.25 v27.25,61.25 | C2.- 21.11,53.11 21.88,53.88 21.88,54.38 | 21.75,58.34 21.88,58.22 21.88,54.38 | 21.88,54.38 31.5,54.38 v31.5,53 31,53 v27.25,49.25 v27.25,48 v27.25,46.75
  Bottom 1: v31.5,53 D1.A
DYNAMO_2_BEFORE_SW  (via drill 0.3)
  Top 0.3: 30,49.88 IC2.D2_3 | 29.78,47.02 IC2.D2_1 | IC4.D2_3 18.78,49.88 IC4.D2_2 | IC4.D2_1 19.57,47.02 IC4.D2_2 | IC4.D2_2 18.75,47.84 v18.75,48 | v29.75,48 29.75,47.84 IC2.D2_2 29.78,49.66
  Top 0.4: IC1.D1_3 21.74,49.64 IC1.D1_2 21.74,47.99 v21.75,48 | IC1.D1_1 21.48,47.02 v21.75,46.75 | 29.78,49.66 30,49.88 | 29.78,47.02 IC2.D2_2 29.78,46.78 v29.75,46.75
  Route2 1: TP1.TP 25.5,61.35 28.3,58.55 28.3,50.7 v29.75,49.25 v29.75,46.75
  Route15 1: v18.75,48 v21.75,48 | 20.25,46.75 v18.75,46.75 v18.75,48 | 20.25,46.75 v21.75,46.75 v21.75,48 | v18.75,48 v18.75,49.25 v21.75,49.25 v21.75,48 | 20.25,46.75 20.25,44.25 29.75,44.25 v29.75,46.75 29.75,49.21
  Bottom 1: D3.A TP1.TP
EN  (via drill 0.3)
  Top 0.254: IC6.14-EN v18.5,36.75
  Bottom 0.3: R21.1 22,36.75 21.25,37.5 20.75,37.5 20,36.75 v18.5,36.75
EN2  (via drill 0.3)
  Top 0.5: IC20.4_EN 23.05,13.7 v23,13.75
  Bottom 0.3: v23,13.75 R24.1
FB  (via drill 0.3)
  Top 0.3: R25.1 v26.5,13.75
  Top 0.5: IC20.3_FB 26.15,13.75 R25.1
  Bottom 0.3: v26.5,13.75 R25.1 R26.2
GATE_D1
  Top 0.4: IC5.1_G1 20.5,56.75 20.78,57.03 20.78,57.04 21.07,57.33 IC3.GATE_DRIVE 23.67,57.33 24.32,56.68 IC3.GATE_PULLD
GATE_D2
  Top 0.3: IC10.GATE_PULLD 23.68,60.57 24.33,59.92 IC10.GATE_DRIVE
  Top 0.4: IC5.4_G2 20.15,59.15 20.5,59.5 20.5,60.24 20.83,60.57 IC10.GATE_PULLD
GATE_D3
  Top 0.4: IC12.GATE_PULLD 10.68,60.57 11.33,59.92 IC12.GATE_DRIVE 14.08,59.92 14.85,59.15 IC5.9_G3
GATE_D4
  Top 0.4: IC16.GATE_DRIVE 10.67,57.33 11.32,56.68 IC16.GATE_PULLD 14.68,56.68 14.75,56.75 IC5.12_G4
GATE_DELON  (via drill 0.3)
  Top 0.3: IC4.G1 16.87,45.12 R11.2 19.25,45.25 19.41,45.09 IC4.G2 | IC17.14_GP5 20,28.5 18.75,29.75 v17.75,29.75
  Route2 0.4: v17.75,29.75 18.75,29.75 19,30 19,34.25 19.25,34.5 19.25,43 R11.2
  other vias: 17,45.25
GATE_DIODE_SMOOTH
  Top 0.45: IC11.GATE_PULLD 9.68,39.68 10.33,40.33 IC11.GATE_DRIVE 10.33,43.26 IC21.G1
GATE_DIODE_V_LIION
  Top 0.45: IC15.GATE_DRIVE 13.17,39.67 13.82,40.32 IC15.GATE_PULLD 13.82,43.5 13.91,43.59 IC21.G2
GATE_GRAETZ  (via drill 0.3)
  Top 0.3: IC2.G1 27.87,45.12 v28,45.25 30.25,45.25 30.41,45.09 IC2.G2 | IC17.12_GP3 21,30.25 v21.25,30.5
  Route2 0.4: v21.25,30.5 21.25,31.5 24.25,34.5 24.25,41.5 v28,45.25
  Bottom 0.3: R6.1 28.25,45 v28,45.25
GATE_SOLAR-CELL
  Top 0.4: IC22.GATE_DRIVE 6.17,39.67 6.82,40.32 IC22.GATE_PULLD 6.82,43.35 IC23.G1
GATE_TUNING-CAP  (via drill 0.3)
  Top 0.3: IC1.G1 22.37,45.12 R1.2 24.75,45.25 24.91,45.09 IC1.G2 | IC17.13_GP4 v20.5,30.5
  Route2 0.4: v20.5,30.5 20.5,32 21.25,32.75 21.25,34.33 22.5,35.58 R1.2
  other vias: 22.5,45.25
GND  (via drill 0.3, 0.4, 1, 1.5)
  Top 0.4: IC12.ANODE v7.65,59.27 v7.64,59.28 | IC5.5_S2 IC5.6_S2 19.57,61.67 19.5,61.75 19.5,61.54 20.68,61.54 21.21,62.07 27.5,62.07 28.11,61.46 28.11,59.8 27.03,58.72 25.31,58.72 24.76,59.27 v22.89,59.27 | IC5.8_S3 IC5.7_S3 | v22.89,59.27 IC10.ANODE | v22.88,59.26 v22.89,59.27
  Top 0.5: v29.5,41.25 30.75,41.25 D5.A
  Bottom 0.5: v28,41.25 v28.75,41.25 v29.5,41.25 | v27.75,36 v28.5,36 | v28.5,36 v29.25,36 | v27.75,37.5 v28.5,37.5 | v28.5,37.5 v29.25,37.5 | R3.1 30.75,36 v29.25,36 | v28.5,36 v28.5,37.5 | v29.25,36 32,36 32,34 32.5,33.5 v33,33.5
  other vias: 3,67 3,3 32,3 32,67 17.5,68 27.5,68 7.5,68 2,63.5 33,63.5 2,53.5 33,53.5 33,43.5 2,23.5 2,13.5 33,23.5 33,13.5 7.5,2 17.5,2 27.5,2 3.5,35.25 23.5,40.5 2,33.5 5,25.5 2,43.5
  pour Route2 (isolate 0.3): 0,70 35,70 35,0 0,0
  pour Top (isolate 0.3, rank 2): 0,70 0,45.25 35,45.25 35,70
  pour Bottom (isolate 0.3, rank 2): 0,70 0,45.25 35,45.25 35,70
  pour Route15 (isolate 0.3): 0,70 35,70 35,45.25 0,45.25
  pour Top: 0,45.25 0,0 35,0 35,45.25 33,45.25 33,2 2,2 2,45.25
  pour Bottom (isolate 0.3, rank 2): 0,45.25 2,45.25 2,2 33,2 33,45.25 35,45.25 35,0 0,0
GND_VIA_INCP  (via drill 0.25, 0.3, 0.35, 0.4)
  Top 0.2: 13.25,20.03 12.38,20.9
  Top 0.254: IC6.6-FB2 v21,36.75 20.63,36.38 19.99,36.38 19.86,36.25 IC6.15-VSEL | IC7.10_DGND 6.75,25.5 | IC7.16_RESET 9.75,25.5 9.25,25.5 | IC8.8 IC9.GND 13.25,20.03 | 12.38,20.9 IC8.11 | IC17.3_A0 IC17.GND | IC7.3_INCP 8.75,33.75 R2.2 | IC7.2_REFG 9.25,25.5 | 9.25,25.5 IC7.GND1 | 6.75,28.5 7.25,28.5 IC7.6_INVG
  Top 0.3: IC6.10-PGND v21,36.75 | IC17.17_GND 20,26 IC17.GND | IC13.11_GND2 26.51,25.01 | 26.51,25.01 IC13.10_GND1 | IC13.GND2 26.51,25.01 | CONN1.1 11.25,18.2 v11.14,18.31 | 13.83,9.5 IC14.GND IC14.GND6 | IC19.7_B 29.83,21.08 30,21.25 30,23.25 30.25,23.5 v31.5,23.5 | IC19.3_GND 24.5,20.42
  Top 0.5: v31.5,13.5 31,13.5
  Top 0.508: v31.75,27.5 31,27.5
  Route15 0.5: v25,43.25 v24.25,43.25 24.75,43.25 24.75,38 v25,37.75 | v25,37.75 v26,37.75 | v21,36.75 24,36.75 v25,37.75
  Bottom 0.254: IC18.GND 6,8.57
  Bottom 0.3: C15.2 20.85,36.6 v21,36.75 | 25.25,43.7 25,43.45 v25,43.25 | C19.2 24.25,43.45 v24.25,43.25 | C22.2 25.95,37.8 v26,37.75 | IC18.VSS 6,8.57 | C29.1 v31.75,27.5
  Bottom 0.45: R10.1 27.5,32.23 R22.1
  Bottom 1: C8.2 20.2,38.9 C5.2 C3.2 20.3,43.35 C17.2 22.85,43.7 C19.2 25.25,43.7 C20.2
  other vias: 8,25.5 20.5,25.5 6,8.25 30.75,24.5 13.25,20 5.25,35.25 9.25,35.25 12.5,35.25 16.5,35.25 16.5,39.25 15.25,42.75 12.75,9.5 16.75,5.5 16.75,7 3.5,13.5 3.5,23.5 3.5,33.5 7.5,3.5 17.5,3.5 27.5,3.5 31.5,33.5 8.5,12.5
  pour Top (isolate 0.3): 3.5,43.5 31.5,43.5 31.5,3.5 3.5,3.5
  pour Bottom (isolate 0.3): 3.5,43.5 31.5,43.5 31.5,3.5 3.5,3.5
ICSP_DI/MISO  (via drill 0.3)
  Top 0.25: IC8.15 11.75,19.08 CONN1.2 11.75,16.75 11.5,16.5 v11.5,16.25
  Bottom 0.25: R18.5 v11.5,16.25
ICSP_DO/MOSI  (via drill 0.3)
  Top 0.25: IC8.16 12.35,18.25 12.25,18.15 CONN1.3 v12.25,15.75
  Bottom 0.25: R18.3 12,15.5 v12.25,15.75
ICSP_SCK  (via drill 0.3)
  Top 0.25: IC8.17 12.8,18 12.75,17.95 CONN1.4 12.75,16.27 13,16.02 v13,15.5
  Bottom 0.25: R18.1 12.5,15 v13,15.5
INCN  (via drill 0.3)
  Top 0.254: IC7.4_INCN 8.25,33.75 7.25,33.75 R2.1
  Top 1: v7.25,35.25 7.25,33.75
  Bottom 1: TP7_IN.TP 4,40 7.25,36.75 v7.25,35.25
INT_MCP2515  (via drill 0.3)
  Top 0.25: v14.75,22.25 14.75,20.92 IC8.5 | v13.75,13 IC14.!INT!
  Route15 0.4: v14.75,22.25 14.75,14 v13.75,13
INVP  (via drill 0.3)
  Top 0.254: IC7.5_INVP 7.75,29.25 v7.25,29.75
  Top 0.3: R7.1 v12.75,29.25
  Top 0.5: R7.1 R8.2
  Route2 0.4: v7.25,29.75 7.75,29.25 v12.75,29.25
LMP92064SD_CS  (via drill 0.3)
  Top 0.254: v9.25,22.75 9,22.75 8.75,23 IC7.14_CSB
  Top 0.3: IC17.16_GP7 v17.5,26.5
  Bottom 0.3: v17.5,26.5 12.25,26.5 9.25,23.5 v9.25,22.75 9.25,16.5 9.5,16.25 R19.6
MCP73871_PG_PIN  (via drill 0.3)
  Top 0.3: IC13.!6_PG! 24.26,26.99 23.75,27.5 22.25,27.5 | 22.25,27.5 IC17.11_GP2 | v22.25,28 22.25,27.5
  Bottom 0.3: R12.1 21.25,29.75 22.25,28.75 v22.25,28
MCP73871_STAT1/!LBO!_PIN  (via drill 0.3)
  Top 0.3: IC17.9_GP0 23.15,26 23.4,25.75 v24.25,25.75 24.37,25.75 24.62,26 IC13.8_STAT1/!LBO!
  Bottom 0.3: R13.1 21.25,27.25 22.75,25.75 v24.25,25.75
MCP73871_STAT2_PIN  (via drill 0.3)
  Top 0.3: IC17.10_GP1 v23.75,26.5 v23.76,26.51 IC13.7_STAT2
  Bottom 0.3: v23.75,26.5 22.75,26.5 21.5,27.75 21.5,28.5 R14.1
N$1
  Top 0.254: IC6.11-L1 20.5,39.06 19.82,39.75 L1.P$1
N$3
  Bottom 1: D1.C D2.A
N$4
  Bottom 0.3: R3.2 31.5,38 | 31.5,38 R5.1 | D2.C 31.5,38
N$5
  Top 0.254: L1.P$2 22.18,39.75 21.5,39.06 IC6.9-L2
N$8
  Bottom 0.254: R17.2 25,32.23 R22.2
  Bottom 0.3: R17.2 R16.2
N$13
  Top 0.3: IC1.S1 21.1,43.5 23.64,43.5 IC1.S2
N$16
  Top 0.3: IC2.S1 26.6,43.5 29.14,43.5 IC2.S2
N$17  (via drill 0.3)
  Top 0.25: IC7.1_REFC v9.75,28
  Bottom 0.3: C9.1 v9.75,28
N$19  (via drill 0.4)
  other vias: 20.25,5.25
N$20
  Top 0.3: IC4.S1 15.6,43.5 18.14,43.5 IC4.S2
PG  (via drill 0.3)
  Top 0.25: IC6.2-PG 20.75,34.5 R23.1
  other vias: 22,33.25
PROG1
  Top 0.3: IC19.1_W 26.95,21.72 27.5,22.27 IC13.13_PROG1
PROG3  (via drill 0.3)
  Top 0.3: IC13.12_PROG3 26.99,23.49 v26.75,23.25
  Bottom 0.25: R15.2 v26.75,23.25
PS/SYNC  (via drill 0.3)
  Top 0.25: v10.5,19.75 10.75,20 IC8.13 | IC6.1-PS/S 20.25,34.5 v20,34.25
  Route2 0.4: v10.5,19.75 10.5,22.5 17,29 19.25,29 19.75,29.5 19.75,34 v20,34.25
RESET  (via drill 0.3)
  Top 0.3: IC14.!RESET! 10,10 9.5,10.5 8.75,10.5 7.75,11.5 v7.75,16.25
  Bottom 0.3: R19.4 9,16 8.75,16.25 v7.75,16.25
RXCAN  (via drill 0.3)
  Top 0.25: IC14.RXCAN 10.25,8.5 v9.5,7.75
  Bottom 0.25: IC18.RXD 8.53,7.28 9,7.75 v9.5,7.75
SOLAR-CELL_TP-IN  (via drill 1)
  Top 1: TP5_OUT.TP v3.5,38
SOLAR-CELL_TP-OUT
  Top 0.45: IC22.ANODE 4.5,42.23 | 4.5,42.23 3.75,42.23 3.5,41.98 TP5_IN.TP | IC23.S1 4.6,42.33 4.5,42.23
SPI_MISO  (via drill 0.3)
  Top 0.25: IC14.SO 11.75,12
  Top 0.254: 11.75,12 v11.5,12.25 | IC7.11_SDO 7.25,23 7,22.75 v6.75,22.75
  Top 0.3: v17.75,24 18.25,24.5 IC17.20_MISO
  Route2 0.4: v11.5,12.25 11.5,13.1 12.9,14.5 14.3,14.5 17,17.2 17,22.85 17.75,23.6 v17.75,24
  Route15 0.4: v6.75,22.75 10.25,26.25 15.33,26.25 17.23,28.15 17.77,28.15 18.15,27.77 18.15,25.6 18.25,25.5 18.25,24.5 v17.75,24
  Bottom 0.25: R18.6 v11.5,12.25
SPI_MOSI  (via drill 0.3)
  Top 0.254: v12.25,12.5 IC14.SI | IC7.12_SDI 7.75,22.5 v7.5,22.25 | v19.5,22.5 IC17.1_MOSI
  Top 0.3: IC19.5_SDI 28.77,19.75 v28,19.75
  Route2 0.4: v12.25,12.5 12.25,13 13,13.75 14.5,13.75 18.75,18 | v19.5,22.5 18.75,21.75 18.75,18 | 18.75,18 19,18.25 25.83,18.25 26.48,18.9 27.15,18.9 v28,19.75
  Route15 0.4: v7.5,22.25 9.25,20.5 9.25,15.25 10,14.5 11.5,14.5 12.25,13.75 v12.25,12.5
  Bottom 0.25: v12.25,12.5 12,12.75 R18.4
SPI_SCK  (via drill 0.3)
  Top 0.254: v13,12.75 13.25,12.5 IC14.SCK | IC7.13_SCLK 8.25,22.5 v8.5,22.25
  Top 0.3: IC19.4_CLK 26.98,19.77 v27,19.75 | IC17.19_SCK 17.5,25 v17.25,24.75
  Route2 0.4: v27,19.75 26.75,19.75 21.5,25 20.82,25 20.74,24.92 20.26,24.92 20.18,25 17.5,25 v17.25,24.75 | v13,12.75 13.5,12.25 14,12.25 19.25,17.5 26,17.5 v26.75,18.25
  Route15 0.4: v26.75,18.25 26.75,19.5 v27,19.75 | v17.25,24.75 10,24.75 8.5,23.25 v8.5,22.25
  Bottom 0.254: v13,12.75 12.5,13.25 R18.2
SPI_SS_MCP23S08  (via drill 0.3)
  Top 0.254: IC17.5_!CS! 22,23.5 v22.25,23.25 | IC8.1 14.77,18 15.27,17.5 v16.25,17.5
  Route15 0.4: v16.25,17.5 19,17.5 22.25,20.75 v22.25,23.25
  Bottom 0.3: R20.1 21.25,24.25 v22.25,23.25
SPI_SS_MCP2515  (via drill 0.3)
  Top 0.25: IC8.14 11.3,19.55 10.5,18.75 10.5,17.75 10.75,17.5 v10.75,15.75 IC14.!CS!
  Bottom 0.25: v10.75,15.75 11,15.5 R18.7
STBY  (via drill 0.3)
  Top 0.25: IC8.12 10.2,20.45 7.75,18 v7.75,17.75
  Bottom 0.25: R19.2 7.75,14.5
  Bottom 0.3: 4.45,10 5.5,10 7.75,12.25 7.75,14.5 7.75,15.25 7,16 7,17 v7.75,17.75 | v3.75,9.75 4,10 4.45,10 | IC18.STBY 4.45,10
SW  (via drill 0.3)
  Top 0.4: L2.2 27,8.1 v27,10.5
  Top 0.5: v27,10.5 27,11.8 IC20.1_SW
  Bottom 0.4: D6.A v27,10.5
THERM  (via drill 0.3)
  Top 0.3: IC13.5_THERM 26.51,28.24 26.25,28.5 v26.25,28.75
  Bottom 0.3: R16.1 v26.25,28.75
TUNIN_CAP2_BIAS
  Route15 1: C2.+ C1.+
  Bottom 0.3: C2.+ 22.89,54.11 22,55 R4.1
TXCAN  (via drill 0.3)
  Top 0.25: IC14.TXCAN 10,9 9.75,8.75 v9.5,8.75
  Bottom 0.25: IC18.TXD 8.53,9.22 9,8.75 v9.5,8.75
V_DC_TP-IN  (via drill 0.3)
  Top 0.3: IC5.11_D1/D4 17.37,57.55 IC5.D1/D4 17.63,57.55 IC5.2_D1/D4
  Top 0.4: IC3.CATHODE v20.72,56.03 | 5.25,57.58 TP1_IN.TP | IC5.D1/D4 v17.5,57.5
  Top 0.45: IC16.CATHODE 7.58,56.03 6.11,57.5 v5.25,57.5 5.25,57.58
  Route15 1: v5.25,57.5 8.25,54.5 18.25,54.5 | C6.+ 18.39,54.5 18.25,54.5 | v16.75,57.5 v17.5,57.5 v18.25,57.5 18.25,56.03 | 18.25,56.03 18.25,54.5 | v20.72,56.03 18.25,56.03
  Bottom 0.3: R4.2 20.75,56 v20.72,56.03
V_DC_TP-OUT  (via drill 0.3)
  Top 0.3: TP1_OUT.TP 5.25,56.03 v5.25,56
  Top 0.45: IC11.ANODE 10.98,39.23 v11,39.25 | v10,45.25 10.1,45.15 IC21.S1
  Route15 0.4: v5.25,56 5.25,52.54 6.97,50.82 6.97,48.28 v10,45.25 11,44.25 v11,39.25
V_LI-ION_BATTERY-CELL  (via drill 0.3)
  Top 0.3: IC13.15_VBAT2 28.49,23.25 | IC13.14_VBAT1 28.01,23.25 28.49,23.25 | 28.49,23.25 v29.25,23.25 29.38,23.38 IC13.16_BAT_SENSE
  Bottom 0.5: C18.1 29.1,23.1 v29.25,23.25
  Bottom 0.61: C18.1 29.1,27.85 30.5,29.25 TP7.TP
V_LI-ION_OUT  (via drill 0.3, 0.4)
  Top 0.3: IC13.1_OUT1 30.25,27.88 v30.25,27.5 30.25,26.99 IC13.20_OUT2
  Top 0.45: IC21.S2 12.64,43.64 v12.5,43.5
  Top 0.5: L2.1 22.25,8.15 v22.25,8.25 22.25,12.75 IC20.5_IN
  Route2 0.4: v17.5,34.5 17.5,30.5 9.83,22.83 9.83,18.08 9.25,17.5 9.25,12.75 11,11 19,11 21.75,8.25 v22.25,8.25 22.75,8.25 23,8.5 v23,12.75
  Route15 0.4: v30.25,27.5 25.25,27.5 24,28.75 20.25,28.75 17.5,31.5 v17.5,34.5 17.5,41 TP3_IN.TP 16.75,42.25 15.5,43.5 v12.5,43.5
  Bottom 0.3: v23,12.75 R24.2 21.4,12.75 C32.1 | C29.2 v30.25,27.5
  other vias: 16.75,41.75
V_LI-ION_TP-OUT  (via drill 0.3)
  Top 0.45: IC15.ANODE 12.52,41.02 v12.5,41
  Route15 0.4: v12.5,41 13.25,40.25 TP3_OUT.TP
  other vias: 16.75,40.25
V_REGULATED_TP-IN  (via drill 0.3)
  Top 0.45: v9.25,43.5 9.03,43.28 IC11.CATHODE
  Top 1: TP2_IN.TP C23.+
  Route2 0.4: C23.+ 7.86,44.89 v9.25,43.5
V_REGULATED_TP-OUT  (via drill 0.3)
  Top 0.25: v18.5,37.75 IC6.12-VIN 19.68,37.75 IC6.VIN 19.68,37.25 IC6.13-VIN
  Top 0.3: IC21.D2_2 13.28,47.02
  Top 0.4: v18.5,37.75 18.75,37.5 IC6.VIN | IC21.D1_3 10.61,49.89 10.75,49.75 | IC21.D1_1 9.93,47.02 IC21.D1_2 10.75,47.84 v10.75,48 | IC21.D2_3 13.28,49.88 IC21.D2_2 13.09,48 12.75,48 | 13.28,47.02 IC21.D2_1 | IC23.D1_2 5.24,47.99 v5.25,48 | 5.24,49.24 v5.25,49.25 | IC23.D1_2 4.99,48.07 IC23.D1_3 | IC23.D1_2 5.25,47.81 v5.25,46.75 4.98,47.02 IC23.D1_1 | IC22.CATHODE 8.25,37.83 v8.25,37.25
  Top 0.45: v15.25,37.25 15.25,37.8 15.22,37.83 IC15.CATHODE | v18.5,39.25 v18.5,38.5 v18.5,37.75
  Top 1: v10.75,48 10.75,49.75 10.75,51.5 TP2_OUT.TP 5.24,51.5 IC23.D1_2 5.24,49.24 | IC21.D1_2 10.91,48 12.75,48 v13.25,48 | IC21.D1_2 10.74,46.75 v13.25,46.75 | IC21.D1_2 10.74,49.25 v13.25,49.25
  Route15 1: v10.75,46.75 v10.75,48 v10.75,49.25
  Bottom 0.4: v18.5,37.75 15.75,37.75 v15.25,37.25 v8.25,37.25
  Bottom 1: v13.25,49.25 v13.25,48 v13.25,46.75 16.75,43.25 C3.1 C5.1 18.3,38.75 | C8.1 18.3,38.75 | v18.5,37.75 18.3,37.75 18.3,38.75
VAUX  (via drill 0.3)
  Top 0.25: 21.25,35 v22,34.25
  Top 0.254: IC6.3-VAUX 21.25,35
  Bottom 0.3: v22,34.25 22.15,34.4 C15.1
VPCC  (via drill 0.3)
  Top 0.3: IC13.2_VPCC v28.01,28.74 v28,28.75
  Bottom 0.254: v28,28.75 28,29.75
  Bottom 0.3: R9.1 28,29.75 R10.2
XTAL1  (via drill 0.3)
  Top 0.25: v16.25,20.75 16.25,20.25 16,20 IC8.3
  Bottom 0.25: v16.25,20.75 14.5,20.75 14.05,21.2 IC9.XTAL1
XTAL2  (via drill 0.3)
  Top 0.25: IC8.2 15.95,19.55 16.25,19.25 v16.25,18.75
  Bottom 0.25: IC9.XTAL2 16.2,18.8 v16.25,18.75
ZENER_COMMON
  Bottom 1: D4.C D3.C

## Text on the board
Top: GND | GND | GND | GND_VIA_INCP | GND_VIA_INCP | GND_VIA_INCP | GND_VIA_INCP | GND_VIA_INCP
Route2: GND | GND | GND | GND | GND | GND | GND | GND
Route15: GND | GND | GND | 5V0_TP-OUT | 5V0_TP-OUT | 5V0_TP-OUT | 5V0_TP-OUT | 5V0_TP-OUT
Bottom: GND | GND | GND | GND_VIA_INCP | GND_VIA_INCP | GND_VIA_INCP | GND_VIA_INCP | GND_VIA_INCP
tPlace: TP1 | TP2 | TP5 | TP3 | TP4 | 6V0 | TP6
bPlace: TP7
tStop: GND | Čos POC / ejovrh rev.1 | vGND
bStop: GND | GND | vGND